# Altium PCB UC3842_SMPS_12V_5A_V2.PcbDoc
Units mil, origin at the board's own origin, x right, y up, seen from the top; angles counter-clockwise.
Board outline 3860.03 x 1922.53 mil, 2 copper layers (Top Layer, Bottom Layer); 43 components, 28 nets, 118 pads, 0 vias.
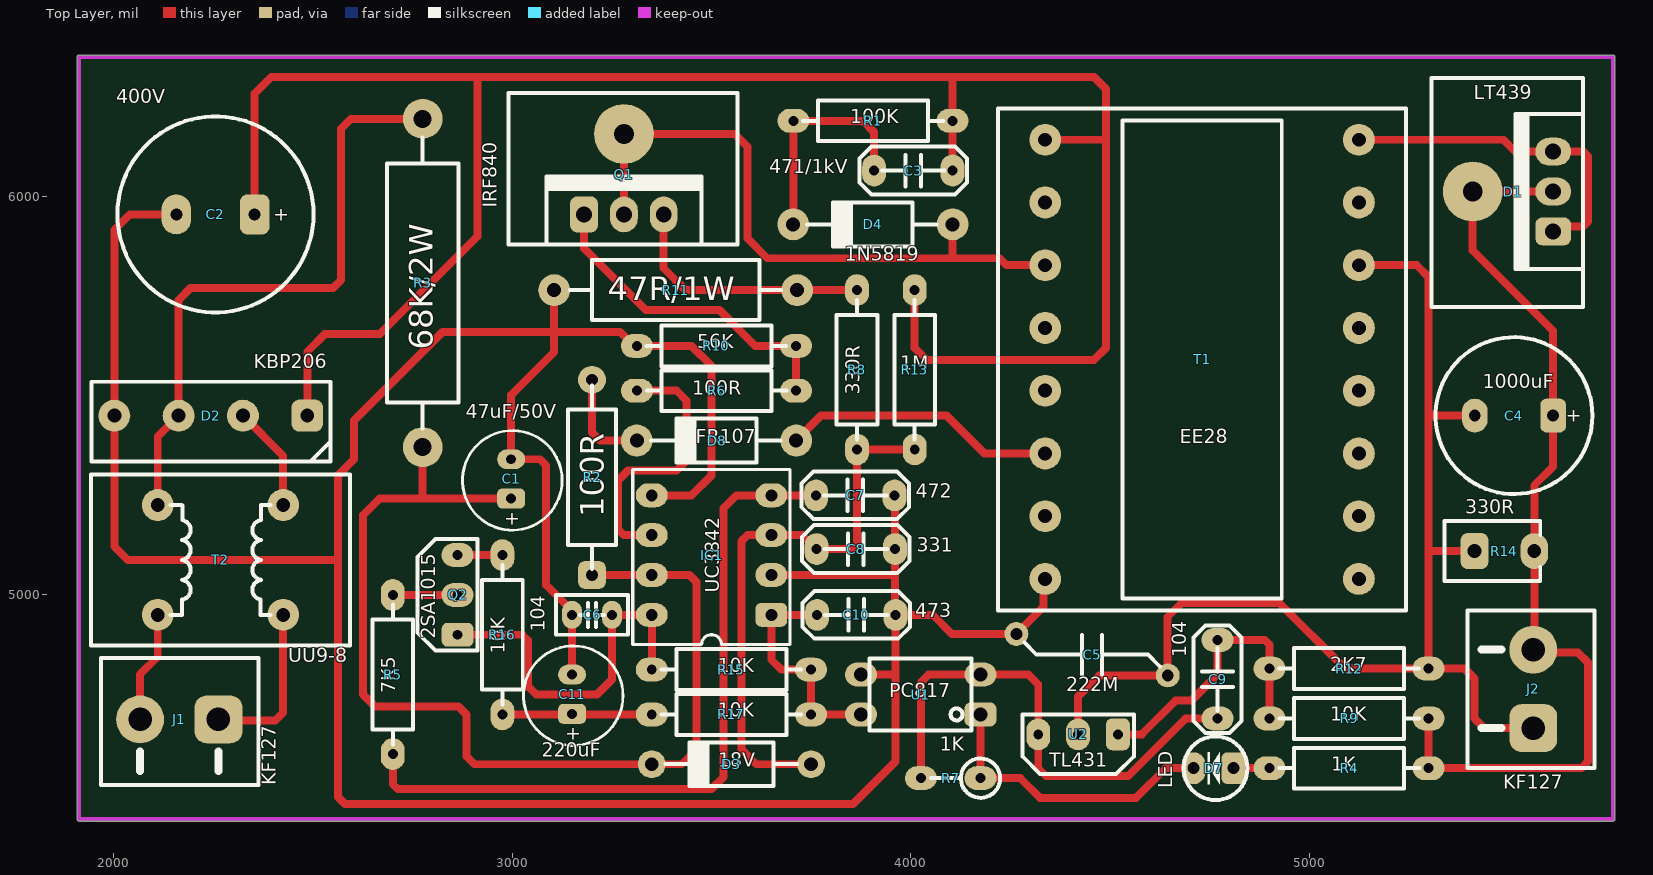
[diagram p0: Top Layer view]
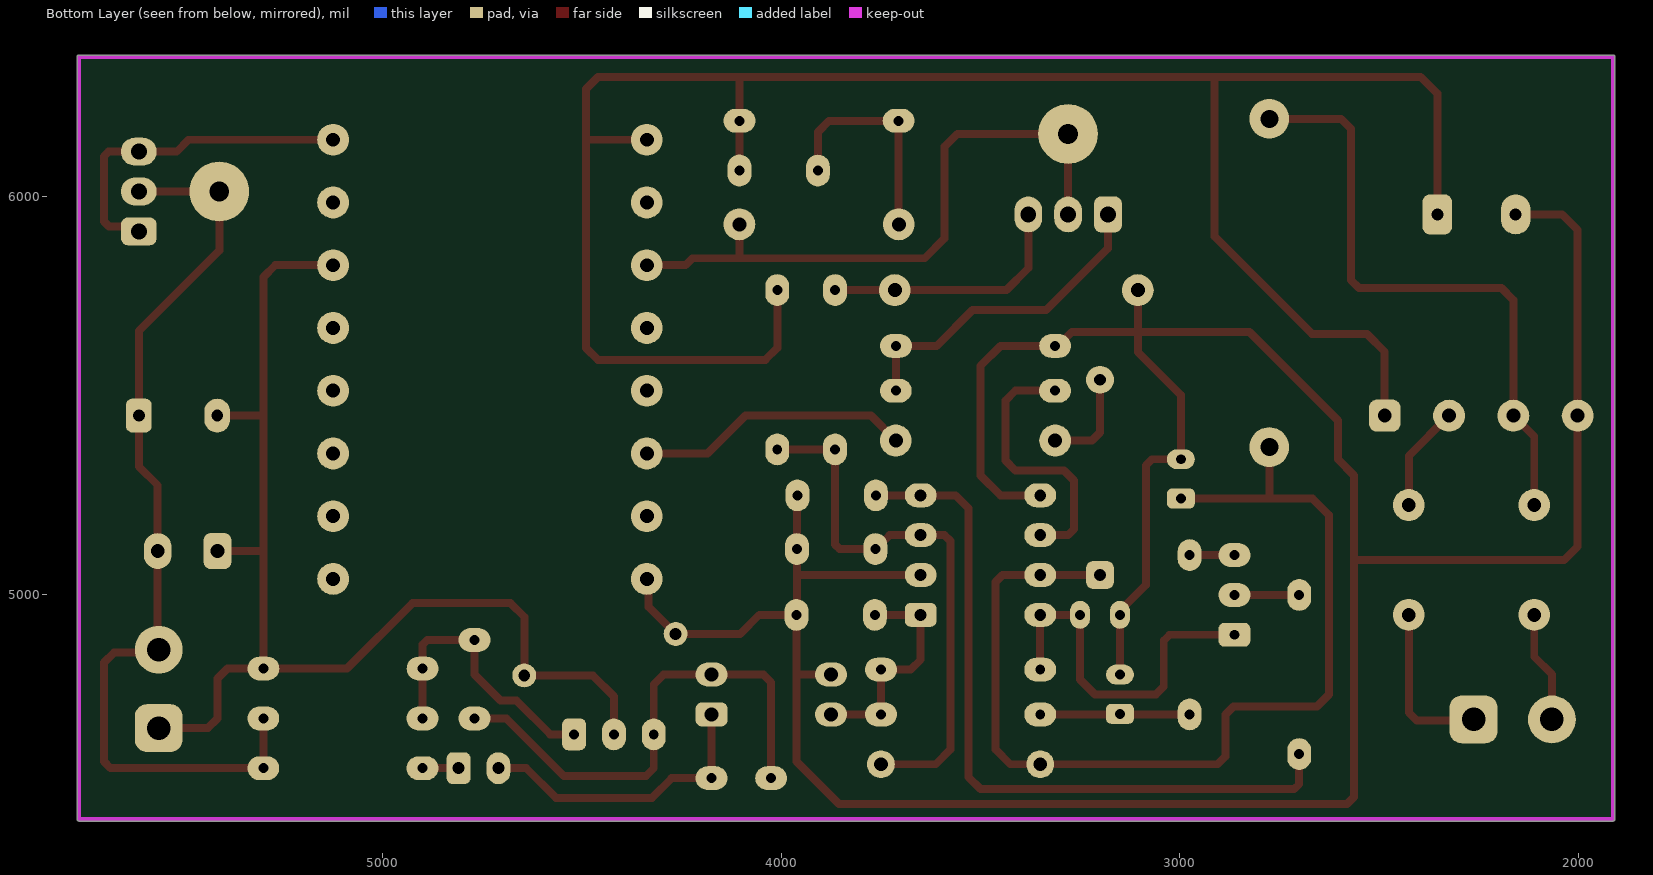
[diagram p1: Bottom Layer view, seen from below]
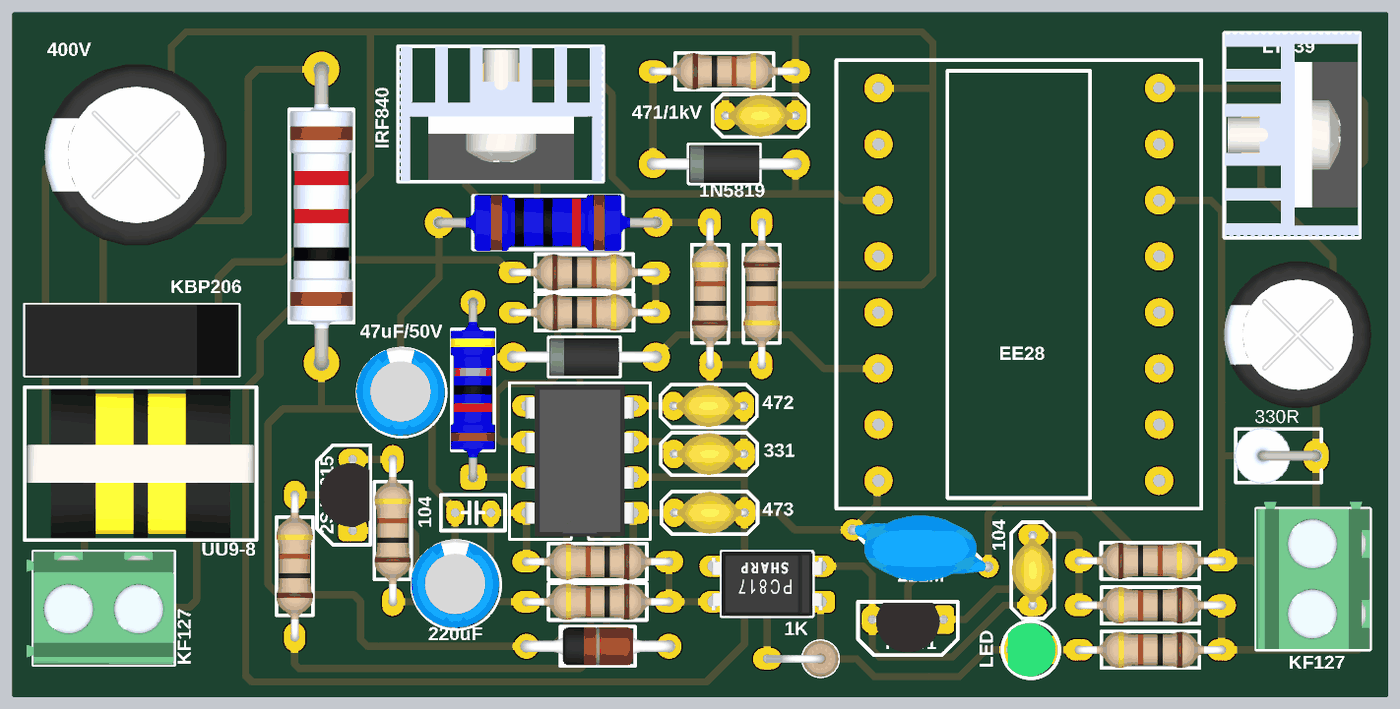
[diagram p2: 3D render of the assembled board from above, using the file's embedded part models]

## Layer stack, top to bottom
Top Solder: solder mask 0.4, Solder Resist, Dk 3.5
Top Layer: signal copper 1.4
Dielectric 1: dielectric 12.6, FR-4, Dk 4.8
Bottom Layer: signal copper 1.4
Bottom Solder: solder mask 0.4, Solder Resist, Dk 3.5

## Board outline
1912.5,4432.48 cw(c1912.5,4437.5) 1907.48,4437.5 1907.48,6350 cw(c1912.5,6350) 1912.5,6355.02 5762.5,6355.02 cw(c5762.5,6350) 5767.52,6350 5767.52,4437.5 cw(c5762.5,4437.5) 5762.5,4432.48

## Design rules (kind name [scope] priority, off if disabled: settings)
Clearance [All] p1: gap=10 ignorepadtopadclearanceinfootprint=FALSE except(0: Arc-Hole Track-Hole SMDPad-Hole THPad-Hole Via-Hole Fill-Hole Poly-Hole Region-Hole Text-Hole)
PolygonConnect [All] p1: connectstyle=Relief reliefconductorwidth=10 reliefentries=4 polygonreliefangle="90 Angle" airgapwidth=10
RoutingVias [All] p1: holewidth=28 width=50 viastyle="Through Hole" minholewidth=28 minwidth=50 maxholewidth=28 maxwidth=50
SolderMaskExpansion [All] p1: expansion=4 istentingtop=FALSE
Width [All] p1: maxlimit=30 minlimit=10 preferedwidth=20
30 further rules are at their usual default settings.

## Components (designator, comment, footprint, x,y, rotation, side; value= is the part's Value field where it differs from the comment)
C1 "47uF/50V" CAP_RAD_2.5mm 3000,5287.5 r90 top
C2 "400V" CAP_RAD_D12.5x15_POL_BK 2255,5955 r180 top
C3 "471/1kV" CAP_DISC_4x3_YL 4006.56,6065 r180 top
C4 "1000uF" CAP_RAD_D10x12.5_POL_BK 5514.07,5450 r180 top
C5 "222M" CAP_DISC_Y2222 4455,4850 r0 top
C6 "104" CAP_Ceramic_Disc_2 3200,4950 r180 top
C7 "472" CAP_DISC_4x3_YL 3860.94,5250 r180 top
C8 "331" CAP_DISC_4x3_YL 3862.19,5115 r0 top
C9 "104" CAP_DISC_4x3_YL 4770,4788.44 r270 top
C10 "473" CAP_DISC_4x3_YL 3863.44,4950 r0 top
C11 "220uF" CAP_RAD_2.5mm 3152.95,4747.05 r90 top
D1 "LT439" TO-220-HEAT-SINK-1 5612.5,6012.5 r90 top
D2 "KBP206" DIODE-KBP206 2243.21,5450 r180 top
D3 "18V" DO-204AL-RD 3550,4575 r180 top
D4 "1N5819" DO-204AL-BK 3905,5930 r180 top
D7 "LED" LED_3MM_GREEN 4765,4565 r180 top
D8 "FR107" DO-204AL-BK 3512.5,5387.5 r180 top
IC1 "UC3842" DIP-8 3502.36,5087.8 r180 top
J1 "KF127" DG127-5.0-02P-14-00AH 2262.5,4687.5 r180 top
J2 "KF127" DG127-5.0-02P-14-00AH 5562.5,4665.65 r90 top
Q1 "IRF840" TO-220-HEAT-SINK-1 3280,5955 r0 top
Q2 "2SA1015" TO-92 2862.5,5000 r90 top
R1 "100K" RES-0.25W-H-CF 3905.2,6189.99 r0 top
R2 "100R" RES-0.5W-H 3200,5295 r90 top
R3 "68K/2W" RES-2W-H 2775,5783 r270 top
R4 "1K" RES-0.25W-H-CF 5100.2,4565 r180 top
R5 "7K5" RES-0.25W-H-CF 2700.01,4800.2 r90 top
R6 "100R" RES-0.25W-H-CF 3512.7,5512.49 r0 top
R7 "1K" RES-0.25W-V-CF 4100.2,4540 r180 top
R8 "330R" RES-0.25W-H-CF 3865.01,5565.2 r90 top
R9 "10K" RES-0.25W-H-CF 5100.2,4690 r180 top
R10 "56K" RES-0.25W-H-CF 3512.3,5625 r0 top
R11 "47R/1W" RES-1W-H 3410,5765 r0 top
R12 "2K7" RES-0.25W-H-CF 5100,4815 r0 top
R13 "1M" RES-0.25W-H-CF 4010,5565.2 r270 top
R14 "330R" RES-1W-V 5415,5110 r0 top
R15 "10K" RES-0.25W-H-CF 3549.8,4812.51 r180 top
R16 "10K" RES-0.25W-H-CF 2975,4900 r90 top
R17 "10K" RES-0.25W-H-CF 3549.8,4700.01 r180 top
T1 "EE28" TRANSFORMER-EE28-VERTICAL(8+8) 4731.2,5591.24 r90 top
T2 "UU9-8" INDUCTOR-BOBBIN-UF9-8 2267.52,5087.8 r90 top
U1 "PC817" PC817-DIP 4025,4750 r180 top
U2 "TL431" TO-92 4420,4650 r180 top

## Footprints (in the part's own frame and the unit in brackets; to place one, negate y for a bottom-side part, rotate by r counter-clockwise, add the part's x,y. Pads: shape width x height; smd on the part's side, far side on the other; paste and mask are expansions set on the pad)
CAP_Ceramic_Disc_2 [mil]
  oval 50x70 hole 25: 1(-50,0) 2(50,0)
  silkscreen extent -90,-50 90,50, body extent -92,-49 92,49, height 289
CAP_DISC_4x3_YL [mil]
  oval 60x80 hole 25: 1(-98.44,0) 2(98.44,0)
  silkscreen extent -135,-60 135,60, body extent -107,-59 107,59, height 215
CAP_DISC_Y2222 [mil]
  round 60 hole 30: 1(-190,52) 2(190,-52)
  silkscreen extent -170,-50 170,50, body extent -202,-93 202,93, height 354
CAP_RAD_2.5mm [mm]
  rrect50% 1.27x1.778 hole 0.635: 1(-1.155,0.075)
  oval 1.27x1.778 hole 0.635: 2(1.345,0.075)
  silkscreen extent -3.17,-3.17 3.17,3.17, body extent -3.07,-3.07 3.23,3.23, height 11.02
CAP_RAD_D10x12.5_POL_BK [mil]
  rrect50% 65x85 hole 30: 1(-98.43,0)
  oval 65x85 hole 30: 2(98.43,0)
  silkscreen extent -197,-197 197,197, body extent -207,-207 207,207, height 551
CAP_RAD_D12.5x15_POL_BK [mil]
  rrect50% 75x100 hole 30: 1(-98.43,0)
  oval 75x100 hole 30: 2(98.43,0)
  silkscreen extent -246,-246 246,246, body extent -256,-256 256,256, height 650
DG127-5.0-02P-14-00AH [mil]
  rrect50% 120x120 hole 59.06: 1(0,0)
  round 120 hole 59.06: 2(196.85,0)
  silkscreen extent -100,-154 295,165, body extent -98,-154 315,165, height 398
DIODE-KBP206 [mil]
  rrect50% 80x80 hole 35: 1(-242.13,0)
  round 80 hole 35: 2(-80.71,0) 3(80.71,0) 4(242.13,0)
  silkscreen extent -300,-85 300,115, body extent -300,-85 300,115, height 530
DIP-8 [mil]
  rrect50% 80x60 hole 30: 1(-147.64,137.8)
  oval 80x60 hole 30: 2(-147.64,37.8) 3(-147.64,-62.2) 4(-147.64,-162.2) 5(152.36,-162.2) 6(152.36,-62.2) 7(152.36,37.8) 8(152.36,137.8)
  silkscreen extent -195,-227 200,213, body extent -150,-220 156,205, height 177
DO-204AL-BK [mil]
  round 80 hole 35: 1(-200,0) 2(200,0)
  silkscreen extent -160,-55 165,55, body extent -216,-53 216,53, height 110
DO-204AL-RD [mil]
  round 70 hole 35: 1(-200,0) 2(200,0)
  silkscreen extent -165,-55 165,55, body extent -216,-53 216,53, height 110
INDUCTOR-BOBBIN-UF9-8 [mil]
  round 80 hole 35: 1(-137.8,-157.48) 2(137.8,-157.48) 3(-137.8,157.48) 4(137.8,157.48)
  silkscreen extent -215,-325 215,325, body extent -209,-318 209,318, height 602
LED_3MM_GREEN [mil]
  rrect50% 60x80 hole 30: 1(-45,0)
  oval 60x80 hole 30: 2(55,0)
  silkscreen extent -80,-80 80,80, body extent -70,-75 65,75, height 223
PC817-DIP [mil]
  rrect50% 80x60 hole 35: 1(-150,50)
  oval 80x60 hole 35: 2(-150,-50) 3(150,-50) 4(150,50)
  silkscreen extent -128,-90 128,90, body extent -155,-90 155,90, height 169
RES-0.5W-H [mil]
  rrect50% 70x70 hole 30: 1(-245,0)
  round 70 hole 30: 2(245,0)
  silkscreen extent -230,-60 230,60, body extent -258,-63 258,63, height 128
RES-0.25W-H-CF [mil]
  oval 80x60 hole 25: 1(-199.8,0) 2(199.8,0.01)
  silkscreen extent -175,-51 175,51, body extent -211,-51 211,51, height 106
RES-0.25W-V-CF [mil]
  oval 80x60 hole 25: 1(-74.8,0) 2(74.8,0)
  silkscreen extent -124,-49 49,49, body extent -126,-51 86,51, height 374
RES-1W-H [mil]
  round 80 hole 35: 1(-305,0) 2(305,0)
  silkscreen extent -265,-75 265,75, body extent -319,-79 319,79, height 179
RES-1W-V [mil]
  rrect50% 70x90 hole 35: 1(0,0)
  oval 70x90 hole 35: 2(150,0)
  silkscreen extent -75,-75 165,75, body extent -79,-79 163,79, height 569
RES-2W-H [mil]
  round 100 hole 45: 1(-412,0) 2(412,0)
  silkscreen extent -365,-90 365,90, body extent -433,-89 433,89, height 194
TO-92 [mil]
  rrect50% 60x80 hole 25: 1(-100,0)
  oval 60x80 hole 25: 2(0,0) 3(100,0)
  silkscreen extent -140,-50 140,100, body extent -109,-48 109,93, height 298
TO-220-HEAT-SINK-1 [mil]
  rrect50% 70x90 hole 40: 1(-100,0)
  round 150 hole 50: 2(0,202)
  oval 70x90 hole 40: 2(0,0) 3(100,0)
  silkscreen extent -290,-75 285,305, body extent -288,-74 286,304, height 791
TRANSFORMER-EE28-VERTICAL(8+8) [mil]
  round 80 hole 35: 1(551.18,393.7) 2(393.7,393.7) 3(236.22,393.7) 4(78.74,393.7) 5(-78.74,393.7) 6(-236.22,393.7) 7(-393.7,393.7) 8(-551.18,393.7) 9(-551.18,-393.7) 10(-393.7,-393.7) 11(-236.22,-393.7) 12(-78.74,-393.7) 13(78.74,-393.7) 14(236.22,-393.7) 15(393.7,-393.7) 16(551.18,-393.7)
  silkscreen extent -630,-512 630,512

## Part data
C1 C2 C4 C11: library part Capacitor(Radian)
C3 C5 C6 C7 C8 C9 C10: library part Capacitors(Disc)
D1: library part Diode-LT439
D2: library part Diode-KBP206
D3: library part Diode-Zener
D4 D8: library part Diode-1N5819, "1A - Schotky Diode"
D7: library part "LED 3MM"
IC1: library part SMPS-UC3842
J1 J2: library part DG127-5.0-02P-14-00AH
Q1: library part Mosfet-IRF840
Q2: library part "Transistor-2SA1015 (TO-92)"
R1 R2 R3 R4 R5 R6 R7 R8 R9 R10 R11 R12 R13 R14 R15 R16 R17: library part "Resistors THD"
T1: library part TRANS-EE28-13-7-VERTICAL(8+8)
T2: library part Inductor-UU9-8
U1: library part Opto-PC817
U2: library part Ic-TL431

## Nets (pads, with @x,y where several pads share a name; then routed paths per layer and width w, separated by ;. In a path a pad name is that pad's centre, name@x,y a point inside that pad or via, vN(x,y) a via of type N, cw(c..) or ccw(c..) an arc to the next point about the centre after c; other vN are vias at no path point)
GND: C1.2 C2.2 C5.1 C6.2 C7.1 C8.2 C10.2 C11.2 D2.4 IC1.2 IC1.5 R10.1 R11.1 T1.8 U1.3 | length 8097
  Top Layer w20: C2.2 2040,5955 2001.08,5916.08 D2.4 2001.08,5121.42 2035,5087.5 2562.5,5087.5 ; R11.1 3105,5660 ; C11.2 C6.2 3150,4960 3085,5025 3085,5325 3069.55,5340.45 C1.2 2997.05,5502.05 3105,5610 3105,5660 ; IC1.5 3450,5250 3500,5300 3500,5575 3450,5625 R10.1 3305.78,5625 3270.78,5660 3105,5660 ; IC1.2 3960.64,5050 ; U1.3 3961.89,4800 ; C7.1 3960.64,5248.76 C8.2 ; C8.2@3960.94,5114.06 3960.94,4950.95 C10.2 ; T1.8 4333.06,5035.62 4333.06,4970.06 C5.1 4103,4902 4055,4950 C10.2 ; 2562.5,5087.5 2562.5,4492.5 2580,4475 3855,4475 3961.89,4581.89 3961.89,4800 ; 2562.5,5087.5 2562.5,5300 2602.95,5340.45 2602.95,5437.95 2825,5660 3105,5660 ; 3961.89,4800 C10.2
NetC1_1: C1.1 D3.2 IC1.7 R2.1 R3.2 | length 2634.2
  Top Layer w20: R3.2@2775,5360 2775,5242.03 ; C1.1 2775,5242.03 ; R2.1 IC1.7 3445,5050 3454.97,5040.03 3462.5,5032.5 3462.5,4612.5 3425,4575 D3.2 2905,4575 2885,4595 2885,4700 2865,4720 2655,4720 2625,4750 2625,5200 2667.03,5242.03 2775,5242.03
NetC2_1: C2.1 C3.1 D2.1 R1.2 R13.1 T1.1 | length 5264.5
  Top Layer w20: C2.1 2353.43,6258.43 2395,6300 2912.5,6300 ; D2.1 2485.33,5610.33 2530,5655 2667.5,5655 2912.5,5900 2912.5,6300 ; R13.1 4010,5620 4040,5590 4460,5590 4490,5620 4490,6142.42 ; C3.1 R1.2 4105,6300 ; T1.1 4490,6142.42 ; 2912.5,6300 4105,6300 ; 4105,6300 4460,6300 4490,6270 4490,6142.42
NetC3_2: C3.2 D4.2 R1.1 | length 571.4
  Top Layer w20: D4.2 3705.2,5930.2 3705.2,6189.8 R1.1 3880.01,6189.99 3908.11,6161.89 C3.2
NetC4_1: C4.1 D1.2 J2.2 R4.1 R9.1 R14.2 | length 2391.1
  Top Layer w20: R9.1 R4.1 5683.28,4565 5700,4581.72 5700,4830 5675,4855 5570,4855 J2.2@5560,4865 ; J2.2 5565,4865 5565,5275 5612.5,5322.5 C4.1 5612.5,5662.5 5410.5,5864.5 5410.5,6012.5 D1.2@5612.5,6012.5
NetC4_2: C4.2 C5.2 J2.1 R12.2 R14.1 T1.14 U2.2 | length 3010.7
  Top Layer w20: U2.2 4420,4745 4473,4798 C5.2 4645,4945 4680,4980 4925,4980 5090,4815 R12.2 ; T1.14 5270,5827.46 5299.8,5797.66 5299.8,5450 ; R14.1 5299.8,5110 ; C4.2 5299.8,5450 ; J2.1 5439.35,4665.65 5415,4690 5415,4790 5389.99,4815.01 R12.2 ; R12.2 5299.8,5110 ; 5299.8,5110 5299.8,5450
NetC6_1: C6.1 IC1.8 Q2.1 R15.2 | length 932.5
  Top Layer w20: Q2.1 3025,4900 3040,4885 3040,4770 3060,4750 3212.5,4750 3250,4787.5 C6.1 IC1.8 R15.2
NetC7_2: C7.2 IC1.4 R5.1 | length 1844
  Top Layer w20: R5.1 2700.01,4524.99 2712.5,4512.5 3500,4512.5 3530,4542.5 3530,5217.5 3562.5,5250 IC1.4 C7.2
NetC8_1: C8.1 D3.1 IC1.3 R8.1 R13.2 | length 1412.3
  Top Layer w20: D3.1 3612.5,4575 3575,4612.5 3575,5135 3590,5150 IC1.3 3727.92,5150 3762.93,5114.99 C8.1 3853.29,5114.99 3865.01,5126.71 R8.1 R13.2
NetC9_1: C9.1 R9.2 R12.1 U2.1 | length 719.3
  Top Layer w20: U2.1 4580,4650 4665,4735 4705,4735 4769.99,4799.99 C9.1 4888.48,4886.89 4900.2,4875.17 R12.1 4900.3,4814.9 4900.3,4690.09 R9.2
NetC9_2: C9.2 R7.2 U1.2 U2.3 | length 1282
  Top Layer w20: R7.2 4025.2,4540.2 4025.2,4780.2 4045,4800 U1.2 4295,4800 4320,4775 U2.3 4320,4565 4340,4545 4545,4545 4690,4690 C9.2
NetC10_1: C10.1 IC1.1 R15.1 R17.1 U1.4 | length 575.4
  Top Layer w20: C10.1 IC1.1 3650,4837.5 3674.99,4812.51 R15.1 R17.1 U1.4
NetC11_1: C11.1 R16.1 R17.2 | length 375.1
  Top Layer w20: R16.1 2975.1,4700.1 3349.9,4700.1 R17.2
NetD1_1: D1.1 D1.3 T1.16 | length 853.5
  Top Layer w20: T1.16 5487.58,6142.42 5517.5,6112.5 5688.28,6112.5 5700,6100.78 5700,5937.5 5687.5,5925 5625,5925 D1.1
NetD2_2: D2.2 T2.2 | length 266.3
  Top Layer w20: D2.2 2425,5348.92 T2.2
NetD2_3: D2.3 R3.1 T2.4 | length 1559.7
  Top Layer w20: T2.4 2110.04,5397.54 D2.3 2162.5,5740 2192.5,5770 2550,5770 2570,5790 2570,6170 2595,6195 R3.1
NetD4_1: D4.1 Q1.2 T1.3 | length 1617.8
  Top Layer w20: Q1.2@3280,5955 3280,6157 3558,6157 3590,6125 3590,5895 3640,5845 4110,5845 ; D4.1 4105,5850 4110,5845 ; T1.3 4240,5827.46 4222.46,5845 4110,5845
NetD7_1: D7.1 R4.2 | length 90.4
  Top Layer w20: D7.1 R4.2
NetD7_2: D7.2 R7.1 U1.1 | length 746.8
  Top Layer w20: U1.1 R7.1 4275,4540 4325,4490 4565,4490 4640,4565 D7.2
NetD8_1: D8.1 T1.6 | length 690.2
  Top Layer w20: D8.1 3775,5450 4090,5450 4184.98,5355.02 T1.6
NetD8_2: D8.2 R2.2 | length 253.3
  Top Layer w20: R2.2 3200,5407.5 3220,5387.5 D8.2
NetIC1_6: IC1.6 R6.1 | length 691.9
  Top Layer w20: R6.1 3412.51,5512.49 3437.5,5487.5 3437.5,5337.5 3412.5,5312.5 3290,5312.5 3265,5287.5 3265,5165 3280,5150 IC1.6
NetJ1_1: J1.1 T2.1 | length 416.8
  Top Layer w20: J1.1 2265,4685 2405,4685 2425,4705 T2.1
NetJ1_2: J1.2 T2.3 | length 280.9
  Top Layer w20: J1.2 2065.65,4800.65 2110.04,4845.04 T2.3
NetQ1_1: Q1.1 R6.2 R10.2 | length 831.3
  Top Layer w20: Q1.1 3180,5870 3335,5715 3520,5715 3609.99,5625.01 R10.2 3712.3,5624.81 3712.3,5512.7 R6.2
NetQ1_3: Q1.3 R8.2 R11.2 | length 642.8
  Top Layer w20: Q1.3 3380,5820 3435,5765 3605,5765 3660,5765 R11.2 R8.2
NetQ2_2: Q2.2 R5.2 | length 162.5
  Top Layer w20: R5.2 Q2.2
NetQ2_3: Q2.3 R16.2 | length 112.6
  Top Layer w20: Q2.3 2862.6,5099.9 2974.89,5099.9 R16.2
pads on no net: T1.2 T1.4 T1.5 T1.7 T1.9 T1.10 T1.11 T1.12 T1.13 T1.15

## Keep-outs
Keep-Out Layer:
  lines w10: 1912.5,4437.5 1912.5,6350 5762.5,6350 5762.5,4437.5 1912.5,4437.5

## Text inside footprints (layer, text, board x,y; h text height)
C1: Top Overlay "+" at 2980,5218.05 h60 r180
C2: Top Overlay "+" at 2440,5980.55 h60 r180
C4: Top Overlay "+" at 5684.07,5475.55 h60 r180
C11: Top Overlay "+" at 3132.95,4677.6 h60 r180